# Altium PCB System Control.PcbDoc (part 5 of 7)
Units mil, origin at the board's own origin, x right, y up, seen from the top; angles counter-clockwise.
Board outline 5312.56 x 5103.22 mil, 12 copper layers (Top, GND 2, Signal 3, Signal 4, 3.3V 5, Signal 6, Signal 7, 2.5V 8, Signal 9, Signal 10, GND 11, Bottom); 503 components, 484 nets, 2219 pads, 1158 vias.
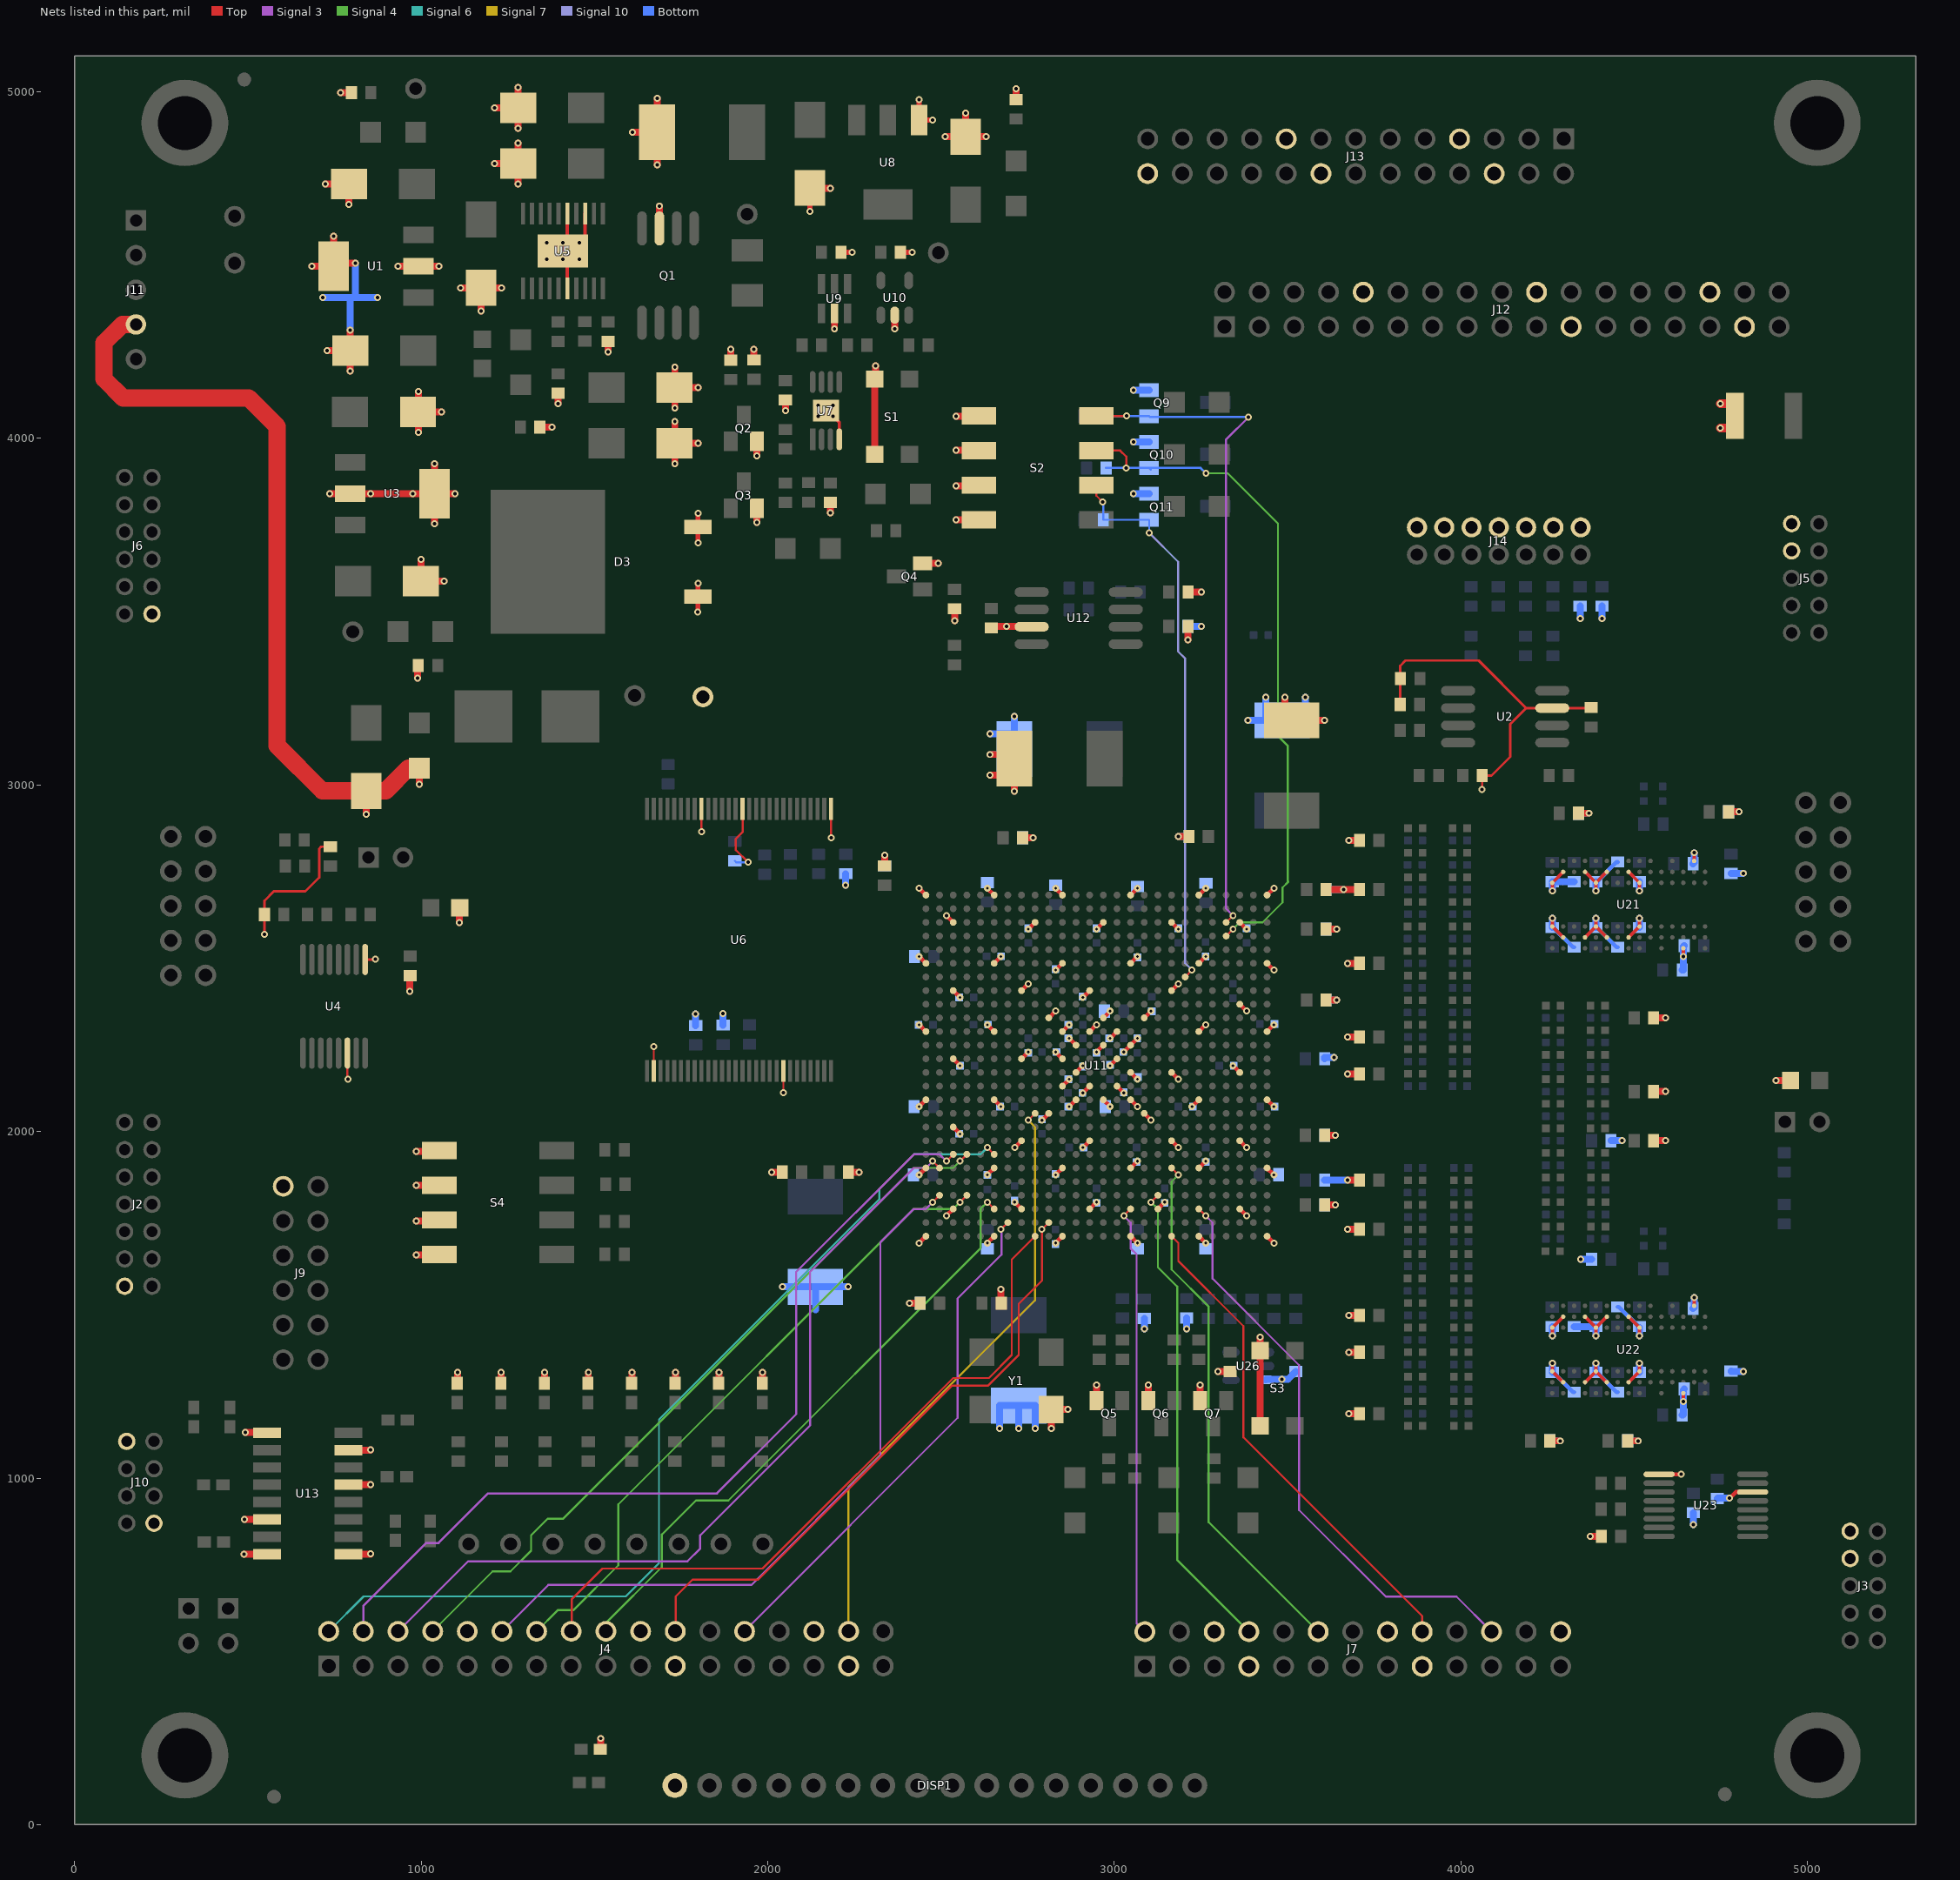
[diagram p15: the nets of this part, all layers, seen from the top]

## Via types
v1: diameter 20, hole 10, Top to Bottom, tented top, 1040 vias
v2: diameter 20, hole 8, Top to Bottom, tented top, 118 vias

## Nets (pads, with @x,y where several pads share a name; then routed paths per layer and width w, separated by ;. In a path a pad name is that pad's centre, name@x,y a point inside that pad or via, vN(x,y) a via of type N, cw(c..) or ccw(c..) an arc to the next point about the centre after c; other vN are vias at no path point) (continued)
FPGA_M0: Q9.1 R152.1 S2.8 U11.AD4 | length 2011.4
  Top w5.91: S2.8@2948.08,4064.88 2948.27,4064.69 v1(3035.28,4064.69) ; U11.AD4@3322.39,2603.54 v1(3342.08,2623.23)
  Signal 3 w5.91: v1(3342.08,2623.23) 3322.39,2642.91 3322.39,3996.85 v1(3387,4061.46)
  Bottom w5.91: R152.1@2968.06,4064.17 2968.58,4064.69 v1(3035.28,4064.69) Q9.1@3091.79,4064.69 ; v1(3387,4061.46) 3102.57,4061.46 Q9.1@3099.85,4064.17 3099.34,4064.69 Q9.1@3091.79,4064.69 ; Q9.1@3091.79,4064.17 Q9.1@3091.79,4064.69 ; Q9.1@3091.79,4064.17 Q9.1@3091.79,4064.69 ; Q9.1@3091.79,4064.17 Q9.1@3091.79,4064.69 ; Q9.1@3091.79,4064.17 Q9.1@3091.79,4064.69 ; Q9.1@3091.79,4064.17 Q9.1@3091.79,4064.69
FPGA_M1: Q10.1 R153.1 S2.7 U11.AC4 | length 2011.7
  Top w5.91: S2.7@2948.08,3964.88 3016.7,3964.88 3034.37,3947.21 v1(3034.37,3914.57) ; U11.AC4@3322.39,2564.17 v1(3342.08,2583.86)
  Signal 4 w5.91: v1(3264.23,3899.12) 3327,3899.12 3472,3754.12 3472,3141 3500.58,3112.42 3500.58,2722.42 3502,2721 3485,2704 3485,2661.02 3427.52,2603.54 3361.76,2603.54 v1(3342.08,2583.86)
  Bottom w5.91: R153.1@2975.93,3914.57 v1(3034.37,3914.57) Q10.1@3099.85,3914.57 ; Q10.1@3105.23,3909.19 Q10.1@3099.85,3914.57 ; v1(3264.23,3899.12) 3248.78,3914.57 Q10.1@3099.85,3914.57
FPGA_M2: Q11.1 R155.1 S2.6 U11.Y7 | length 1618.5
  Top w5.91: S2.6@2948.08,3864.88 2948.08,3834.44 v1(2966.08,3816.45) ; U11.Y7@3204.28,2446.06 v1(3223.97,2465.75)
  Signal 10 w5.91: v1(3100.45,3727.32) 3184,3643.78 3184,3385 3204.28,3364.72 3204.28,2485.43 v1(3223.97,2465.75)
  Bottom w5.91: v1(2966.08,3816.45) 2968.06,3814.47 R155.1@2968.06,3764.96 Q11.1@3099.85,3764.96 3100.45,3764.36 v1(3100.45,3727.32)
GND: C1.N C2.N C3.N C4.N C5.2 C6.2 C7.2 C8.N C9.N C11.N C12.N C13.1 C15.2 C17.2 C18.2 C19.2 C20.2 C22.N C23.N C25.N C31.2 C32.2 C34.2 C35.N C36.2 C37.N C38.N C42.2 C43.2 C44.2 C45.2 C46.2 C47.2 C48.2 C49.2 C50.2 C51.2 C52.2 C53.2 C54.N C55.2 C56.2 C57.2 C58.2 C59.2 C60.2 C61.2 C62.2 C63.2 C64.2 C65.2 C66.2 C67.2 C68.2 C69.2 C76.2 C77.2 C78.2 C80.1 C85.2 C86.2 C87.2 C88.2 C100.2 C102.N C104.2 C105.N C106.2 C107.2 C108.2 C109.2 C110.2 C112.2 C113.2 C115.2 C116.2 C117.2 C118.2 C119.2 C120.2 C121.2 C122.2 C123.2 C124.N C125.2 C126.2 C127.2 C129.2 C130.2 C131.2 C132.2 C133.2 C134.2 C135.2 C136.2 C137.2 C138.2 C139.2 C140.2 C141.2 C142.2 C143.2 C145.2 C146.2 C147.2 C148.2 C149.2 C150.2 C151.2 C152.2 C153.2 C154.2 C155.2 C156.2 C157.2 C158.2 C159.2 C160.2 C161.2 C163.2 C164.2 C165.2 C167.2 C168.2 C169.2 C170.2 C171.2 C172.N C173.2 C174.2 C175.2 C178.2 C179.2 C180.2 C181.2 C182.2 C183.2 C185.2 C186.2 C187.2 C205.2 C208.2 C209.2 C210.2 C211.2 C212.2 C213.2 C214.2 C215.2 C216.2 C225.2 C226.2 C227.2 C228.2 C229.2 C230.2 C231.2 C232.2 C233.2 C234.2 C235.2 C236.2 C237.2 C238.2 C240.2 C241.2 C242.2 C243.2 C244.2 C245.2 C246.2 C247.2 C248.2 C251.2 C253.2 D3.1 D3.3 DISP1.1 J2.14 J3.7 J3.9 J4.10 J4.20 J4.21 J4.30 J4.31 J5.7 J5.9 J6.11 J7.6 J7.7 J7.16 J7.17 J7.26 J9.12 J11.4 J12.10 J12.20 J12.21 J12.30 J12.31 J13.6 J13.7 J13.16 J13.17 J13.26 J14.1 J14.3 J14.5 J14.7 J14.9 J14.11 J14.13 L2.1 Q1.3 Q2.2 Q3.2 Q4.2 Q5.2 Q6.2 Q7.2 Q9.2 Q10.2 Q11.2 R2.1 R3.1 R4.1 R7.1 R10.2 R15.1 R17.1 R18.1 R25.2 R26.1 R28.1 R31.2 R33.1 R34.1 R36.1 R43.1 R44.1 R45.1 R46.1 R129.2 R147.1 R163.1 R165.2 R170.1 R275.1 S1.1 S1.1_1 S2.1 S2.2 S2.3 S2.4 S3.1 S3.1_1 S4.1 S4.2 S4.3 S4.4 TP5.1 U1.2 U1.4 U2.7 U3.2 U3.4 U4.1 U4.14 U5.0 U5.3 U5.5 U5.16 U6.2 U6.21 U6.29 U6.42 U6.48 U7.0 U7.4 U8.1 U9.2 U10.2 U11.A1 U11.A6 U11.A11 U11.A16 U11.A21 U11.A26 U11.AA1 U11.AA6 U11.AA11 U11.AA16 U11.AA21 U11.AA26 U11.AD3 U11.AD8 U11.AD13 U11.AD18 U11.AD24 U11.AF1 U11.AF6 U11.AF11 U11.AF16 U11.AF21 U11.AF26 U11.C3 U11.C9 U11.C14 U11.C19 U11.C24 U11.F1 U11.F6 U11.F11 U11.F16 U11.F21 U11.F26 U11.H3 U11.H8 U11.H14 U11.H19 U11.J24 U11.K10 U11.K17 U11.L1 U11.L6 U11.L11 U11.L13 U11.L15 U11.L21 U11.L26 U11.M12 U11.M14 U11.M16 U11.N3 U11.N8 U11.N11 U11.N15 U11.P12 U11.P16 U11.P19 U11.P24 U11.R11 U11.R13 U11.R15 U11.T1 U11.T6 U11.T12 U11.T14 U11.T16 U11.T21 U11.T26 U11.U10 U11.U13 U11.U17 U11.V3 U11.W8 U11.W14 U11.W19 U11.W24 U12.7 U13.9 U13.13 U13.15 U21.A3 U21.A7 U21.B2 U21.B8 U21.D2 U21.D8 U21.E3 U21.E7 U21.F2 U21.F8 U21.H2 U21.H8 U21.J3 U21.J7 U21.N1 U21.P9 U22.A3 U22.A7 U22.B2 U22.B8 U22.D2 U22.D8 U22.E3 U22.E7 U22.F2 U22.F8 U22.H2 U22.H8 U22.J3 U22.J7 U22.N1 U22.P9 U23.1 U23.14 U26.3 Y1.2 | length 33778.8
  Top w5.91: U6.2@1670.94,2175.05 1670.94,2244.94 v1(1671,2245) ; U6.48@1808.73,2930.95 1808.73,2865.27 v1(1809,2865) ; U6.42@1926.84,2930.95 1927.25,2930.54 1927.25,2864.25 1908,2845 1908,2812 v1(1943,2777) ; U6.21@2044.95,2175.05 2044.95,2112.05 v1(2045,2112) ; U6.29@2182.75,2930.95 2182.75,2848.25 v1(2183,2848)
  Top w7: v1(547.82,2568.47) 547.74,2568.54 C13.1@547.74,2625.97 547.74,2666.05 574.69,2693 666,2693 705.97,2732.97 705.97,2816.4 711.54,2821.97 C5.2@737.74,2821.97 ; U4.14@786.94,2226.44 786.94,2152.75 v1(788.65,2151.05) ; U4.1@838.14,2496.44 866.32,2496.44 v1(867.39,2497.51) ; C20.2@3824.4,3232.23 R15.1@3824.4,3306.23 ; R15.1@3825.4,3307.23 R15.1@3824.4,3306.23 ; v1(4059.96,2987.03) 4061.4,2988.47 C19.2@4061.4,3027.23 4087.84,3027.23 4141.93,3081.32 4141.93,3175.81 4188.06,3221.94 ; C18.2@4375.4,3223.23 4374.11,3221.94 U2.7@4263.37,3221.94 4188.06,3221.94 ; R15.1@3824.4,3306.23 R15.1@3824.4,3307.23 ; R15.1@3824.4,3306.23 R15.1@3824.4,3307.23 ; R15.1@3824.4,3306.23 3824.4,3343.72 ; R15.1@3824.4,3306.23 R15.1@3824.4,3307.23 ; R15.1@3824.4,3306.23 R15.1@3824.4,3307.23 ; R15.1@3824.4,3307.23 3824.4,3343.72 ; R15.1@3824.4,3307.23 3824.4,3343.72 ; R15.1@3824.4,3307.23 3824.4,3343.72 ; R15.1@3824.4,3307.23 3824.4,3343.72 ; 3824.4,3343.72 3839.63,3358.95 4051.05,3358.95 4188.06,3221.94
  Top w10: v1(1456.25,4564.17) 1472.98,4580.91 U5.3@1472.98,4648.82 ; U7.0@2167.86,4079.92 U7.0@2167.86,4095.67 ; U7.4@2206.25,3997.24 2206.25,4046.46 v1(2188.53,4064.17) ; v1(4263.34,1331.89) U22.A3@4263.34,1308.27 U22.B2@4294.83,1276.77 ; v1(4263.34,1410.63) U22.A7@4263.34,1434.25 U22.B8@4294.83,1465.75 ; v1(4263.34,2615.35) U21.A3@4263.34,2591.73 U21.B2@4294.83,2560.24 ; v1(4263.34,2694.09) U21.A7@4263.34,2717.72 U21.B8@4294.83,2749.21 ; U22.D2@4357.82,1276.77 U22.E3@4389.32,1308.27 ; U22.D8@4357.82,1465.75 U22.E7@4389.32,1434.25 ; U21.D2@4357.82,2560.24 U21.E3@4389.32,2591.73 ; U21.D8@4357.82,2749.21 U21.E7@4389.32,2717.72 ; v1(4389.32,1331.89) U22.E3@4389.32,1308.27 ; v1(4389.32,1410.63) U22.E7@4389.32,1434.25 ; v1(4389.32,2615.35) U21.E3@4389.32,2591.73 ; v1(4389.32,2694.09) U21.E7@4389.32,2717.72 ; U22.F2@4420.82,1276.77 U22.E3@4389.32,1308.27 ; U22.F8@4420.82,1465.75 U22.E7@4389.32,1434.25 ; U21.F2@4420.82,2560.24 U21.E3@4389.32,2591.73 ; U21.F8@4420.82,2749.21 U21.E7@4389.32,2717.72 ; U22.H2@4483.81,1276.77 U22.J3@4515.3,1308.27 v1(4515.3,1331.89) ; U22.H8@4483.81,1465.75 U22.J7@4515.3,1434.25 v1(4515.3,1410.63) ; U21.H2@4483.81,2560.24 U21.J3@4515.3,2591.73 v1(4515.3,2615.35) ; U21.H8@4483.81,2749.21 U21.J7@4515.3,2717.72 v1(4515.3,2694.09) ; v1(4641.29,1221.65) U22.N1@4641.29,1245.28 ; v1(4641.29,2505.12) U21.N1@4641.29,2528.74 ; U22.P9@4672.78,1497.24 v1(4672.78,1520.87) ; U21.P9@4672.78,2780.71 v1(4672.78,2804.33) ; U5.16@1421.8,4432.28 U5.0@1421.8,4516.93 ; U5.16@1421.8,4432.28 U5.0@1421.8,4516.93 ; U5.16@1421.8,4432.28 U5.0@1421.8,4516.93 ; U5.16@1421.8,4432.28 U5.0@1421.8,4516.93 ; U5.16@1421.8,4432.28 U5.0@1421.8,4516.93 ; U5.0@1421.8,4516.93 U5.0@1421.8,4540.55 ; U5.0@1421.8,4516.93 U5.0@1421.8,4540.55 ; U5.0@1421.8,4516.93 U5.0@1421.8,4540.55 ; U5.0@1421.8,4516.93 U5.0@1421.8,4540.55 ; U5.0@1421.8,4516.93 U5.0@1421.8,4540.55 ; U5.0@1421.8,4540.55 U5.0@1421.8,4564.17 ; U5.0@1421.8,4540.55 U5.0@1421.8,4564.17 ; U5.0@1421.8,4540.55 U5.0@1421.8,4564.17 ; U5.0@1421.8,4540.55 U5.0@1421.8,4564.17 ; U5.0@1421.8,4540.55 U5.0@1421.8,4564.17 ; U5.0@1421.8,4564.17 U5.5@1421.8,4648.82 ; U5.0@1421.8,4564.17 U5.5@1421.8,4648.82 ; U5.0@1421.8,4564.17 U5.5@1421.8,4648.82 ; U5.0@1421.8,4564.17 U5.5@1421.8,4648.82 ; U5.0@1421.8,4564.17 U5.5@1421.8,4648.82 ; v1(2145.22,4064.17) U7.0@2167.86,4064.17 ; v1(2145.22,4064.17) U7.0@2167.86,4064.17 ; v1(2145.22,4064.17) U7.0@2145.22,4079.92 ; v1(2145.22,4064.17) U7.0@2145.22,4079.92 ; v1(2145.22,4064.17) U7.0@2145.22,4079.92 ; v1(2145.22,4064.17) U7.0@2167.86,4064.17 ; v1(2145.22,4064.17) U7.0@2167.86,4064.17 ; v1(2145.22,4064.17) U7.0@2145.22,4079.92 ; U7.0@2145.22,4079.92 v1(2145.22,4095.67) ; U7.0@2145.22,4079.92 v1(2145.22,4095.67) ; U7.0@2145.22,4079.92 v1(2145.22,4095.67) ; U7.0@2145.22,4079.92 v1(2145.22,4095.67) ; v1(2145.22,4095.67) U7.0@2167.86,4095.67 ; v1(2145.22,4095.67) U7.0@2167.86,4095.67 ; v1(2145.22,4095.67) U7.0@2167.86,4095.67 ; v1(2145.22,4095.67) U7.0@2167.86,4095.67 ; U7.0@2167.86,4064.17 v1(2188.53,4064.17) ; U7.0@2167.86,4064.17 v1(2188.53,4064.17) ; U7.0@2167.86,4064.17 v1(2188.53,4064.17) ; U7.0@2167.86,4064.17 v1(2188.53,4064.17) ; U7.0@2167.86,4095.67 v1(2188.53,4095.67) ; U7.0@2167.86,4095.67 v1(2188.53,4095.67) ; U7.0@2167.86,4095.67 v1(2188.53,4095.67) ; U7.0@2167.86,4095.67 v1(2188.53,4095.67) ; v1(2188.53,4064.17) U7.0@2188.53,4079.92 ; v1(2188.53,4064.17) U7.0@2188.53,4079.92 ; v1(2188.53,4064.17) U7.0@2188.53,4079.92 ; v1(2188.53,4064.17) U7.0@2188.53,4079.92 ; U7.0@2188.53,4079.92 v1(2188.53,4095.67) ; U7.0@2188.53,4079.92 v1(2188.53,4095.67) ; U7.0@2188.53,4079.92 v1(2188.53,4095.67) ; U7.0@2188.53,4079.92 v1(2188.53,4095.67)
  Top w12: v1(2436.56,1678.34) U11.A26@2456.25,1698.03 ; v2(2436.56,1875.19) U11.F26@2456.25,1894.88 ; v2(2436.56,2072.04) U11.L26@2456.25,2091.73 ; v2(2436.56,2308.27) U11.T26@2456.25,2288.58 ; v2(2436.56,2505.12) U11.AA26@2456.25,2485.43 ; v1(2436.56,2701.97) U11.AF26@2456.25,2682.28 ; v1(2515.3,1757.08) U11.C24@2534.99,1776.77 ; v1(2515.3,2623.23) U11.AD24@2534.99,2603.54 ; U11.P24@2534.99,2209.84 v2(2554.67,2190.16) ; U11.W24@2534.99,2406.69 v2(2554.67,2387.01) ; v2(2633.41,1678.34) U11.A21@2653.1,1698.03 ; v2(2633.41,1875.19) U11.F21@2653.1,1894.88 ; v2(2633.41,2308.27) U11.T21@2653.1,2288.58 ; v2(2633.41,2701.97) U11.AF21@2653.1,2682.28 ; U11.L21@2653.1,2091.73 v2(2672.79,2072.04) ; U11.AA21@2653.1,2485.43 v2(2672.79,2505.12) ; v2(2712.15,1796.46) U11.C19@2731.84,1776.77 ; v1(2712.15,1953.93) U11.H19@2731.84,1973.62 ; U11.P19@2731.84,2209.84 v2(2751.53,2229.53) ; U11.W19@2731.84,2406.69 v1(2751.53,2426.38) ; v2(2751.52,2583.86) U11.AD18@2771.21,2603.54 ; v2(2790.89,2032.67) U11.K17@2810.58,2052.36 ; U11.U17@2810.58,2327.95 v1(2830.27,2347.64) ; v2(2830.26,1678.34) U11.A16@2849.95,1698.03 ; v2(2830.26,1875.19) U11.F16@2849.95,1894.88 ; v2(2830.26,2229.53) U11.P16@2849.95,2209.84 ; v2(2830.26,2465.75) U11.AA16@2849.95,2485.43 ; v2(2830.26,2701.97) U11.AF16@2849.95,2682.28 ; U11.M16@2849.95,2131.1 v2(2869.64,2150.79) ; U11.T16@2849.95,2288.58 v2(2869.64,2308.27) ; v2(2869.63,2072.04) U11.L15@2889.32,2091.73 ; v2(2869.63,2268.9) U11.R15@2889.32,2249.21 ; U11.N15@2889.32,2170.47 v2(2909.01,2190.16) ; v2(2909,1953.93) U11.H14@2928.69,1973.62 ; v2(2909.01,2111.42) U11.M14@2928.69,2131.1 ; v2(2909,2387.01) U11.W14@2928.69,2406.69 ; U11.C14@2928.69,1776.77 v2(2948.38,1796.46) ; U11.T14@2928.69,2288.58 v1(2948.38,2308.27) ; v2(2948.37,2229.53) U11.R13@2968.06,2249.21 ; v2(2948.37,2583.86) U11.AD13@2968.06,2603.54 ; U11.L13@2968.06,2091.73 v2(2987.75,2072.04) ; U11.U13@2968.06,2327.95 v2(2987.75,2347.64) ; v2(2987.74,2190.16) U11.P12@3007.43,2209.84 ; v2(2987.74,2268.9) U11.T12@3007.43,2288.58 ; U11.M12@3007.43,2131.1 v2(3027.12,2111.42) ; v2(3027.11,2229.53) U11.R11@3046.8,2249.21 v2(3066.49,2268.9) ; U11.A11@3046.8,1698.03 v2(3066.49,1678.34) ; U11.F11@3046.8,1894.88 v2(3066.49,1914.57) ; U11.L11@3046.8,2091.73 v1(3066.49,2072.04) ; U11.N11@3046.8,2170.47 v2(3066.49,2150.79) ; U11.AA11@3046.8,2485.43 v2(3066.49,2505.12) ; U11.AF11@3046.8,2682.28 v2(3066.49,2701.97) ; U11.K10@3086.17,2052.36 v1(3105.86,2032.67) ; U11.U10@3086.17,2327.95 v2(3105.86,2347.64) ; U11.C9@3125.54,1776.77 v2(3145.23,1796.46) ; U11.H8@3164.91,1973.62 v1(3184.6,1953.93) ; U11.N8@3164.91,2170.47 v1(3184.6,2150.79) ; U11.W8@3164.91,2406.69 v1(3184.6,2426.38) ; U11.AD8@3164.91,2603.54 v2(3184.6,2583.86) ; v2(3223.96,2072.04) U11.L6@3243.65,2091.73 ; U11.A6@3243.65,1698.03 v2(3263.34,1678.34) ; U11.F6@3243.65,1894.88 v2(3263.34,1914.57) ; U11.T6@3243.65,2288.58 v1(3263.34,2308.27) ; U11.AA6@3243.65,2485.43 v2(3263.34,2505.12) ; U11.AF6@3243.65,2682.28 v2(3263.34,2701.97) ; v2(3342.07,2190.16) U11.N3@3361.76,2170.47 ; U11.C3@3361.76,1776.77 v1(3381.45,1757.08) ; U11.H3@3361.76,1973.62 v1(3381.45,1953.93) ; U11.V3@3361.76,2367.32 v1(3381.45,2347.64) ; U11.AD3@3361.76,2603.54 v2(3381.45,2583.86) ; U11.A1@3440.5,1698.03 v1(3460.19,1678.34) ; U11.F1@3440.5,1894.88 v2(3460.19,1875.19) ; U11.L1@3440.5,2091.73 v2(3460.19,2072.04) ; U11.T1@3440.5,2288.58 v2(3460.19,2308.27) ; U11.AA1@3440.5,2485.43 v1(3460.19,2465.75) ; U11.AF1@3440.5,2682.28 v1(3460.19,2701.97) ; U11.J24@2534.99,2012.99 v2(2554.68,1993.31) U11.J24@2534.99,2012.99
  Top w12.01: U23.1@4571.56,1011.14 v1(4635.26,1011.14) ; v1(4775.15,942.13) 4792.98,959.96 ; 4792.98,959.96 U23.14@4841.56,959.96 ; 4792.98,959.96 U23.14@4841.56,959.96 ; 4792.98,959.96 U23.14@4841.56,959.96 ; 4792.98,959.96 U23.14@4841.56,959.96 ; 4792.98,959.96 U23.14@4841.56,959.96
  Top w13.78: v1(1798.18,3499.43) D3.1@1798.18,3543.82 1798.18,3581.66 v1(1798.88,3582.36) ; v1(1798.47,3698.3) 1798.47,3743.52 D3.3@1798.18,3743.82 1798.18,3783.53 v1(1798.47,3783.82)
  Top w15: v1(2121.6,4654.72) C37.N@2121.6,4721.65 ; C42.2@2211.07,4536.61 v1(2243.65,4536.61) ; C44.2@2382.33,4536.61 v1(2416.88,4536.61) ; v1(2436.56,4977.56) U8.1@2436.56,4918.5 v1(2475.93,4918.5)
  Top w20: v1(684.59,4497.24) 747.11,4497.24 U1.4@747.59,4496.77 ; v1(723.97,4733.46) C1.N@791.74,4733.46 ; v1(727.9,4253.15) C3.N@794.83,4253.15 ; v1(747.59,4583.86) U1.4@747.59,4496.77 ; v1(767.27,4997.24) R2.1@798.77,4997.24 ; U13.9@790,781 854,781 v1(854.31,781.3) ; U13.13@790,981 854,981 v1(854.31,981.3) ; U13.15@790,1081 854,1081 v1(854.31,1081.3) ; v1(790.89,4674.41) C1.N@790.89,4732.6 ; U3.2@794.83,3840.32 U3.2@794.83,3839.76 ; C3.N@795.68,4253.15 C3.N@794.83,4253.15 ; v1(810.58,4505.12) 756.09,4505.12 U1.4@747.68,4496.69 U1.4@747.59,4496.77 ; v1(841.49,2915.12) C8.N@841.49,2982.9 ; v1(932.63,4497.24) 991.13,4497.24 U1.2@991.68,4496.69 992.23,4497.24 v1(1050.74,4497.24) ; v1(967,2405) C6.2@967,2449 ; v1(985.86,1643.96) v1@985.94,1643.88 ; v1(985.86,1742.39) 1050.59,1742.39 S4.3@1052.08,1743.88 ; v1(985.86,1844.75) S4.2@1051.22,1844.75 ; v1(985.86,1943.17) 1051.37,1943.17 S4.1@1052.08,1943.88 ; v1(989.24,3307.64) R3.1@989.24,3343.07 ; C2.N@990.83,4075.98 C2.N@991.68,4075.98 ; v1(995.03,3001.73) C7.2@995.03,3048.9 C7.2@995.03,3048.98 ; C4.N@998.71,3587.8 C4.N@999.56,3587.8 ; U3.4@1038.83,3840.32 U3.4@1038.93,3840.31 ; v1(1038.93,3753.15) U3.4@1038.93,3839.76 ; v1(1058.61,4075.98) C2.N@991.68,4075.98 ; v1(1066.48,3587.8) C4.N@999.56,3587.8 ; v1(1097.98,3839.76) U3.4@1038.93,3839.76 ; R46.1@1104,1273.92 R46.1@1104,1274 1105,1275 v1(1105,1305) ; v1(1110,2603) R10.2@1110,2633 ; R10.2@1111.74,2645.97 1111.82,2645.97 R10.2@1112.82,2644.97 ; v1(1113.73,4434.25) C9.N@1171.92,4434.25 ; v1(1172.78,4367.32) C9.N@1172.78,4434.25 ; C9.N@1172.78,4435.1 C9.N@1172.78,4434.25 ; v1(1212.15,4792.52) C12.N@1279.93,4792.52 ; v1(1212.15,4953.94) C11.N@1279.08,4953.94 ; R45.1@1229.71,1274 1229.71,1274.08 1230.71,1275.08 v1(1230.71,1305.08) ; v1(1279.08,4733.46) C12.N@1279.08,4791.65 ; v1(1279.08,4851.57) C12.N@1279.08,4793.39 ; v1(1279.08,4894.88) C11.N@1279.08,4953.07 ; R4.1@1342.07,4032.68 v1(1377.51,4032.68) ; R44.1@1355.43,1274 1355.43,1274.08 1356.43,1275.08 v1(1356.43,1305.08) ; v1(1395.22,4099.61) C15.2@1395.22,4130.22 ; v1(1456.25,4516.93) U5.0@1421.8,4516.93 ; v1(1456.25,4564.17) U5.0@1421.8,4564.17 ; R43.1@1481.14,1274 1481.14,1274.08 1482.14,1275.08 v1(1482.14,1305.08) ; R7.1@1517,218 1517,218.08 1518,219.08 v1(1518,249.08) ; v1(1538.93,4249.21) C17.2@1538.93,4279.83 ; R36.1@1606.86,1274 1606.86,1274.08 1607.86,1275.08 v1(1607.86,1305.08) ; v1(1680.66,4788.58) C25.N@1680.66,4883.07 ; Q1.3@1687.15,4605.51 v1(1687.15,4670.47) ; C23.N@1730.99,3985.43 C23.N@1731.84,3985.43 ; v1(1731.84,4087.8) C22.N@1731.84,4145.98 ; v1(1731.84,4205.91) C22.N@1731.84,4147.72 ; R34.1@1732.57,1274 1732.57,1274.08 1733.57,1275.08 v1(1733.57,1305.08) ; v1(1798.77,3985.43) C23.N@1731.84,3985.43 ; v1(1798.77,4146.85) C22.N@1730.99,4146.85 ; R28.1@1858.29,1274 1858.29,1274.08 1859.29,1275.08 v1(1859.29,1305.08) ; R17.1@1893.26,4225.59 v1(1893.26,4257.09) ; C31.2@1960.19,4226.47 v1(1960.19,4257.09) ; R18.1@1984,1274 1984,1274.08 1985,1275.08 v1(1985,1305.08) ; v1(2011.37,1883.07) C36.2@2041.98,1883.07 ; v1(2050.74,4079.92) C34.2@2050.74,4110.53 ; C37.N@2121.6,4722.5 C37.N@2121.6,4721.65 ; v1(2180.66,3784.65) R25.2@2180.66,3815.26 ; v1(2192.47,4316.14) U9.2@2192.47,4360.43 ; C43.2@2232.72,1883.07 v1(2263.34,1883.07) ; S1.1@2308.61,3953.94 S1.1_1@2308.61,4170.94 2310.58,4172.91 v1(2310.58,4209.84) ; C45.2@2336.93,2766.69 v1(2336.93,2797.3) ; v1(2365.7,4316.14) 2365.7,4354.88 U10.2@2366.33,4355.51 ; v1(2409,1505.12) C46.2@2439.62,1505.12 ; v1(2491.68,3638.98) v1@2491.68,3639.17 ; v1(2511.37,4871.26) 2569.56,4871.26 C38.N@2570.42,4870.41 C38.N@2570.42,4871.26 ; v1(2538.93,3473.62) R31.2@2538.93,3508.17 ; v1(2542.86,3764.96) 2542.94,3764.88 S2.4@2609.08,3764.88 ; v1(2542.86,3863.39) 2607.59,3863.39 S2.3@2609.08,3864.88 ; v1(2542.86,3965.75) 2608.22,3965.75 S2.2@2609.08,3964.88 ; v1(2542.86,4064.17) 2608.37,4064.17 S2.1@2609.08,4064.88 ; v1(2570.42,4938.19) C38.N@2570.42,4871.26 ; C48.2@2645.22,3453.06 2650.03,3457.87 v1(2688.53,3457.87) 2759.99,3457.87 U12.7@2761.37,3456.5 ; v1(2672.78,1544.49) 2672.78,1505.98 C47.2@2673.65,1505.12 ; v1@2711.41,2981.77 v1(2711.56,2981.61) C35.N@2711.56,3028.85 ; R33.1@2716.09,4977.56 v1(2716.09,5009.06) ; C49.2@2734.98,2847.64 v1(2765.59,2847.64) ; Y1.2@2817.67,1198.03 Y1.2@2818.45,1198.03 ; v1(2865.7,1198.03) Y1.2@2818.45,1198.03 ; v1(2948.37,1268.9) Q5.2@2948.37,1223.9 ; v1(3097.98,1268.9) Q6.2@3097.98,1223.9 ; v1(3184.59,2851.57) C50.2@3215.21,2851.57 ; v1(3212.15,3418.5) 3212.15,3457.01 C52.2@3213.04,3457.87 ; C51.2@3212.15,3557.17 C51.2@3213.04,3556.3 ; C51.2@3213.04,3556.3 v1(3251.52,3556.3) ; v1(3247.59,1268.9) Q7.2@3247.59,1223.9 ; C53.2@3334.2,1307.39 C53.2@3334.2,1308.27 ; S3.1@3420.82,1150.79 S3.1_1@3420.82,1367.79 v1(3420.82,1406.69) ; v1(3605.85,3186.22) C54.N@3550.74,3186.22 ; C56.2@3606.74,1788.58 v1(3637.35,1788.58) ; C55.2@3606.74,1989.37 v1(3637.35,1989.37) ; C63.2@3610.67,2379.13 v1(3641.29,2379.13) ; C59.2@3610.67,2583.86 v1(3641.29,2583.86) ; C60.2@3610.67,2698.03 v1(3660.97,2698.03) C58.2@3707.34,2698.03 ; v1(3672.78,1717.72) C66.2@3707.34,1717.72 ; v1(3672.78,1859.45) C65.2@3707.34,1859.45 ; v1(3672.78,2166.54) C64.2@3707.34,2166.53 ; v1(3672.78,2272.83) C62.2@3707.34,2272.83 ; v1(3672.78,2485.43) C61.2@3707.34,2485.43 ; v1(3676.72,1186.22) C69.2@3707.34,1186.22 ; v1(3676.72,1363.39) C68.2@3707.34,1363.39 ; v1(3676.72,1469.68) C67.2@3707.34,1469.68 ; v1(3676.72,2839.76) C57.2@3707.34,2839.76 ; C76.2@4256.34,1107.48 v1(4286.96,1107.48) ; C77.2@4339.02,2918.5 v1(4369.63,2918.5) ; v1(4373.57,831.89) C80.1@4405.07,831.89 ; C78.2@4480.75,1107.48 v1(4511.37,1107.48) ; C87.2@4555.56,1973.62 v1(4590.11,1973.62) ; C86.2@4555.56,2115.35 v1(4590.11,2115.35) ; C85.2@4555.56,2327.95 v1(4590.11,2327.95) ; C88.2@4772.09,2922.44 v1(4802.71,2922.44) ; v1(4909,2146.85) R129.2@4950.99,2146.85 ; v1(735.78,3839.76) U3.2@794.83,3839.76 ; v1(735.78,3839.76) U3.2@794.83,3839.76 ; v1(735.78,3839.76) U3.2@794.83,3839.76 ; v1(735.78,3839.76) U3.2@794.83,3839.76 ; v1(735.78,3839.76) U3.2@794.83,3839.76 ; C1.N@790.89,4732.6 C1.N@791.74,4733.46 ; C1.N@790.89,4732.6 C1.N@791.74,4733.46 ; C1.N@790.89,4732.6 C1.N@791.74,4733.46 ; C1.N@790.89,4732.6 C1.N@791.74,4733.46 ; C1.N@790.89,4732.6 C1.N@791.74,4733.46 ; U3.2@794.83,3839.76 v1(853.89,3839.76) ; U3.2@794.83,3839.76 v1(853.89,3839.76) ; U3.2@794.83,3839.76 v1(853.89,3839.76) ; U3.2@794.83,3839.76 v1(853.89,3839.76) ; U3.2@794.83,3839.76 v1(853.89,3839.76) ; v1(794.83,4194.09) C3.N@794.83,4253.15 ; v1(794.83,4194.09) C3.N@794.83,4253.15 ; v1(794.83,4194.09) C3.N@794.83,4253.15 ; v1(794.83,4194.09) C3.N@794.83,4253.15 ; v1(794.83,4194.09) C3.N@794.83,4253.15 ; C3.N@794.83,4253.15 v1(794.83,4312.2) ; C3.N@794.83,4253.15 v1(794.83,4312.2) ; C3.N@794.83,4253.15 v1(794.83,4312.2) ; C3.N@794.83,4253.15 v1(794.83,4312.2) ; C3.N@794.83,4253.15 v1(794.83,4312.2) ; v1(853.89,3839.76) v1(975.93,3839.76) ; v1(975.93,3839.76) U3.4@1038.83,3839.76 ; v1(975.93,3839.76) U3.4@1038.83,3839.76 ; v1(975.93,3839.76) U3.4@1038.83,3839.76 ; v1(975.93,3839.76) U3.4@1038.83,3839.76 ; v1(975.93,3839.76) U3.4@1038.83,3839.76 ; v1@985.94,1643.88 1052.08,1643.88 1052,1643.88 v1@985.94,1643.88 ; v1(991.68,4016.93) C2.N@991.68,4075.98 ; v1(991.68,4016.93) C2.N@991.68,4075.98 ; v1(991.68,4016.93) C2.N@991.68,4075.98 ; v1(991.68,4016.93) C2.N@991.68,4075.98 ; v1(991.68,4016.93) C2.N@991.68,4075.98 ; C2.N@991.68,4075.98 v1(991.68,4135.04) ; C2.N@991.68,4075.98 v1(991.68,4135.04) ; C2.N@991.68,4075.98 v1(991.68,4135.04) ; C2.N@991.68,4075.98 v1(991.68,4135.04) ; C2.N@991.68,4075.98 v1(991.68,4135.04) ; C4.N@999.56,3587.8 v1(999.56,3650.79) ; C4.N@999.56,3587.8 v1(999.56,3650.79) ; C4.N@999.56,3587.8 v1(999.56,3650.79) ; C4.N@999.56,3587.8 v1(999.56,3650.79) ; C4.N@999.56,3587.8 v1(999.56,3650.79) ; U3.4@1038.83,3839.76 U3.4@1038.93,3839.76 ; U3.4@1038.83,3839.76 U3.4@1038.93,3839.76 ; U3.4@1038.83,3839.76 U3.4@1038.93,3839.76 ; U3.4@1038.83,3839.76 U3.4@1038.93,3839.76 ; U3.4@1038.83,3839.76 U3.4@1038.93,3839.76 ; U3.4@1038.93,3839.76 U3.4@1038.93,3840.31 ; U3.4@1038.93,3840.32 v1(1038.93,3926.38) ; U3.4@1038.93,3840.32 v1(1038.93,3926.38) ; U3.4@1038.93,3840.32 v1(1038.93,3926.38) ; U3.4@1038.93,3840.32 v1(1038.93,3926.38) ; U3.4@1038.93,3840.32 v1(1038.93,3926.38) ; S4.2@1051.22,1844.75 1052.08,1843.88 1051.48,1844.48 S4.2@1051.22,1844.75 ; C9.N@1171.92,4434.25 C9.N@1172.78,4435.1 ; C9.N@1171.92,4434.25 C9.N@1172.78,4435.1 ; C9.N@1171.92,4434.25 C9.N@1172.78,4435.1 ; C9.N@1171.92,4434.25 C9.N@1172.78,4435.1 ; C9.N@1171.92,4434.25 C9.N@1172.78,4435.1 ; C9.N@1172.78,4434.25 v1(1231.84,4434.25) ; C9.N@1172.78,4434.25 v1(1231.84,4434.25) ; C9.N@1172.78,4434.25 v1(1231.84,4434.25) ; C9.N@1172.78,4434.25 v1(1231.84,4434.25) ; C9.N@1172.78,4434.25 v1(1231.84,4434.25) ; C12.N@1279.08,4791.65 C12.N@1279.93,4792.52 ; C12.N@1279.08,4791.65 C12.N@1279.93,4792.52 ; C12.N@1279.08,4791.65 C12.N@1279.93,4792.52 ; C12.N@1279.08,4791.65 C12.N@1279.93,4792.52 ; C12.N@1279.08,4791.65 C12.N@1279.93,4792.52 ; C12.N@1279.08,4793.39 C12.N@1279.93,4792.52 ; C12.N@1279.08,4793.39 C12.N@1279.93,4792.52 ; C12.N@1279.08,4793.39 C12.N@1279.93,4792.52 ; C12.N@1279.08,4793.39 C12.N@1279.93,4792.52 ; C12.N@1279.08,4793.39 C12.N@1279.93,4792.52 ; C11.N@1279.08,4953.07 C11.N@1279.93,4953.94 ; C11.N@1279.08,4953.07 C11.N@1279.93,4953.94 ; C11.N@1279.08,4953.07 C11.N@1279.93,4953.94 ; C11.N@1279.08,4953.07 C11.N@1279.93,4953.94 ; C11.N@1279.08,4953.07 C11.N@1279.93,4953.94 ; C11.N@1279.08,4953.94 v1(1279.08,5012.99) ; C11.N@1279.08,4953.94 v1(1279.08,5012.99) ; C11.N@1279.08,4953.94 v1(1279.08,5012.99) ; C11.N@1279.08,4953.94 v1(1279.08,5012.99) ; C11.N@1279.08,4953.94 v1(1279.08,5012.99) ; C11.N@1279.08,4953.94 C11.N@1279.93,4953.94 ; v1(1361.76,4516.93) v1(1409,4516.93) ; v1(1361.76,4516.93) v1(1409,4516.93) ; v1(1361.76,4516.93) v1(1409,4516.93) ; v1(1361.76,4516.93) v1(1409,4516.93) ; v1(1361.76,4564.17) v1(1409,4564.17) ; v1(1361.76,4564.17) v1(1409,4564.17) ; v1(1361.76,4564.17) v1(1409,4564.17) ; v1(1361.76,4564.17) v1(1409,4564.17) ; v1(1409,4516.93) U5.0@1409,4540.55 v1(1409,4564.17) ; v1(1409,4516.93) U5.0@1421.8,4516.93 ; v1(1409,4516.93) U5.0@1421.8,4516.93 ; v1(1409,4516.93) U5.0@1421.8,4516.93 ; v1(1409,4516.93) U5.0@1421.8,4516.93 ; v1(1409,4564.17) U5.0@1421.8,4564.17 ; v1(1409,4564.17) U5.0@1421.8,4564.17 ; v1(1409,4564.17) U5.0@1421.8,4564.17 ; v1(1409,4564.17) U5.0@1421.8,4564.17 ; C25.N@1680.5,4883.07 v1(1609.79,4883.07) C25.N@1680.5,4883.07 ; C25.N@1680.5,4883.07 C25.N@1680.66,4883.07 ; C25.N@1680.5,4883.07 C25.N@1680.66,4883.07 ; C25.N@1680.66,4883.07 v1(1680.66,4981.5) ; C25.N@1680.66,4883.07 v1(1680.66,4981.5) ; C25.N@1680.66,4883.07 v1(1680.66,4981.5) ; C25.N@1680.66,4883.07 v1(1680.66,4981.5) ; C25.N@1680.66,4883.07 v1(1680.66,4981.5) ; C22.N@1730.99,4146.85 C22.N@1731.84,4145.98 ; C22.N@1730.99,4146.85 C22.N@1731.84,4145.98 ; C22.N@1730.99,4146.85 C22.N@1731.84,4145.98 ; C22.N@1730.99,4146.85 C22.N@1731.84,4147.72 ; C22.N@1730.99,4146.85 C22.N@1731.84,4147.72 ; C22.N@1730.99,4146.85 C22.N@1731.84,4147.72 ; C22.N@1730.99,4146.85 C22.N@1731.84,4145.98 ; C22.N@1730.99,4146.85 C22.N@1731.84,4147.72 ; C22.N@1730.99,4146.85 C22.N@1731.84,4147.72 ; C22.N@1730.99,4146.85 C22.N@1731.84,4145.98 ; C22.N@1730.99,4146.85 C22.N@1731.84,4147.72 ; C22.N@1730.98,4146.84 C22.N@1731.84,4145.98 ; v1(1731.84,3926.38) C23.N@1731.84,3985.43 ; v1(1731.84,3926.38) C23.N@1731.84,3985.43 ; v1(1731.84,3926.38) C23.N@1731.84,3985.43 ; v1(1731.84,3926.38) C23.N@1731.84,3985.43 ; v1(1731.84,3926.38) C23.N@1731.84,3985.43 ; C23.N@1731.84,3985.43 v1(1731.84,4048.43) ; C23.N@1731.84,3985.43 v1(1731.84,4048.43) ; C23.N@1731.84,3985.43 v1(1731.84,4048.43) ; C23.N@1731.84,3985.43 v1(1731.84,4048.43) ; C23.N@1731.84,3985.43 v1(1731.84,4048.43) ; v1(1968.06,3757.09) Q3.2@1968.06,3798.33 ; v1(1968.06,3757.09) Q3.2@1968.06,3798.33 ; v1(1968.06,3757.09) Q3.2@1968.06,3798.33 ; v1(1968.06,3757.09) Q3.2@1968.06,3798.33 ; v1(1968.06,3757.09) Q3.2@1968.06,3798.33 ; Q3.2@1968.06,3798.35 Q3.2@1968.26,3798.35 ; Q3.2@1968.06,3798.35 Q3.2@1968.26,3798.35 ; Q3.2@1968.06,3798.35 Q3.2@1968.26,3798.35 ; Q3.2@1968.06,3798.35 Q3.2@1968.26,3798.35 ; Q3.2@1968.06,3798.35 Q3.2@1968.26,3798.35 ; v1(1968.06,3950) Q2.2@1968.06,3991.24 ; v1(1968.06,3950) Q2.2@1968.06,3991.24 ; v1(1968.06,3950) Q2.2@1968.06,3991.24 ; v1(1968.06,3950) Q2.2@1968.06,3991.24 ; v1(1968.06,3950) Q2.2@1968.06,3991.24 ; Q2.2@1968.06,3991.26 Q2.2@1968.26,3991.24 ; Q2.2@1968.06,3991.26 Q2.2@1968.26,3991.24 ; Q2.2@1968.06,3991.26 Q2.2@1968.26,3991.24 ; Q2.2@1968.06,3991.26 Q2.2@1968.26,3991.24 ; Q2.2@1968.06,3991.26 Q2.2@1968.26,3991.24 ; C37.N@2121.6,4721.65 v1(2180.66,4721.65) ; C37.N@2121.6,4721.65 v1(2180.66,4721.65) ; C37.N@2121.6,4721.65 v1(2180.66,4721.65) ; C37.N@2121.6,4721.65 v1(2180.66,4721.65) ; C37.N@2121.6,4721.65 v1(2180.66,4721.65) ; Q4.2@2446.5,3639.17 v1@2491.68,3639.17 ; Q4.2@2446.5,3639.17 v1@2491.68,3639.17 ; Q4.2@2446.5,3639.17 v1@2491.68,3639.17 ; Q4.2@2446.5,3639.17 v1@2491.68,3639.17 ; Q4.2@2446.5,3639.17 v1@2491.68,3639.17 ; C38.N@2570.42,4871.26 v1(2629.48,4871.26) ; C38.N@2570.42,4871.26 v1(2629.48,4871.26) ; C38.N@2570.42,4871.26 v1(2629.48,4871.26) ; C38.N@2570.42,4871.26 v1(2629.48,4871.26) ; C38.N@2570.42,4871.26 v1(2629.48,4871.26) ; v1(2640.7,3028.85) C35.N@2711.41,3028.85 ; v1(2640.7,3028.85) C35.N@2711.41,3028.85 ; v1(2640.7,3028.85) C35.N@2711.41,3028.85 ; v1(2640.7,3028.85) C35.N@2711.41,3028.85 ; v1(2640.7,3028.85) C35.N@2711.41,3028.85 ; v1(2640.7,3087.91) C35.N@2711.41,3087.91 ; v1(2640.7,3087.91) C35.N@2711.41,3087.91 ; v1(2640.7,3087.91) C35.N@2711.41,3087.91 ; v1(2640.7,3087.91) C35.N@2711.41,3087.91 ; v1(2640.7,3087.91) C35.N@2711.41,3087.91 ; C35.N@2711.41,3028.85 C35.N@2711.56,3028.85 ; C35.N@2711.41,3028.85 C35.N@2711.56,3028.85 ; C35.N@2711.41,3028.85 C35.N@2711.56,3028.85 ; C35.N@2711.41,3028.85 C35.N@2711.56,3028.85 ; C35.N@2711.41,3028.85 C35.N@2711.56,3028.85 ; C35.N@2711.41,3076.1 2711.56,3075.94 C35.N@2711.56,3028.85 ; C35.N@2711.41,3076.1 2711.41,3029.01 C35.N@2711.56,3028.85 ; C35.N@2711.41,3076.1 2711.56,3076.25 C35.N@2711.56,3087.91 ; C35.N@2711.41,3087.91 C35.N@2711.56,3087.91 ; C35.N@2711.41,3087.91 C35.N@2711.56,3087.91 ; C35.N@2711.41,3087.91 C35.N@2711.56,3087.91 ; C35.N@2711.41,3087.91 C35.N@2711.56,3087.91 ; C35.N@2711.41,3087.91 C35.N@2711.56,3087.91 ; v1(2818.45,1142.91) Y1.2@2818.45,1198.03 ; v1(2818.45,1142.91) Y1.2@2818.45,1198.03 ; v1(2818.45,1142.91) Y1.2@2818.45,1198.03 ; v1(2818.45,1142.91) Y1.2@2818.45,1198.03 ; v1(2818.45,1142.91) Y1.2@2818.45,1198.03 ; Q5.2@2948.18,1223.72 Q5.2@2948.37,1223.9 ; Q5.2@2948.18,1223.72 Q5.2@2948.37,1223.9 ; Q5.2@2948.18,1223.72 Q5.2@2948.37,1223.9 ; Q5.2@2948.18,1223.72 Q5.2@2948.37,1223.9 ; Q5.2@2948.18,1223.72 Q5.2@2948.37,1223.9 ; Q6.2@3097.78,1223.72 Q6.2@3097.98,1223.9 ; Q6.2@3097.78,1223.72 Q6.2@3097.98,1223.9 ; Q6.2@3097.78,1223.72 Q6.2@3097.98,1223.9 ; Q6.2@3097.78,1223.72 Q6.2@3097.98,1223.9 ; Q6.2@3097.78,1223.72 Q6.2@3097.98,1223.9 ; Q7.2@3247.39,1223.72 Q7.2@3247.59,1223.9 ; Q7.2@3247.39,1223.72 Q7.2@3247.59,1223.9 ; Q7.2@3247.39,1223.72 Q7.2@3247.59,1223.9 ; Q7.2@3247.39,1223.72 Q7.2@3247.59,1223.9 ; Q7.2@3247.39,1223.72 Q7.2@3247.59,1223.9 ; v1(3298.77,1308.27) C53.2@3334.2,1308.27 ; v1(3298.77,1308.27) C53.2@3334.2,1308.27 ; v1(3298.77,1308.27) C53.2@3334.2,1308.27 ; v1(3298.77,1308.27) C53.2@3334.2,1308.27 ; v1(3298.77,1308.27) C53.2@3334.2,1308.27 ; C54.N@3491.68,3186.22 C54.N@3511.37,3186.22 ; C54.N@3491.68,3186.22 C54.N@3511.37,3186.22 ; C54.N@3491.68,3186.22 C54.N@3511.37,3186.22 ; C54.N@3491.68,3186.22 C54.N@3491.68,3186.38 ; C54.N@3491.68,3186.22 C54.N@3491.68,3186.38 ; C54.N@3491.68,3186.22 C54.N@3491.68,3186.38 ; C54.N@3491.68,3186.22 C54.N@3511.37,3186.22 ; C54.N@3491.68,3186.22 C54.N@3491.68,3186.38 ; C54.N@3491.68,3186.22 C54.N@3511.37,3186.22 ; C54.N@3491.68,3186.22 C54.N@3491.68,3186.38 ; C54.N@3491.68,3186.38 v1(3491.68,3253.15) ; C54.N@3491.68,3186.38 v1(3491.68,3253.15) ; C54.N@3491.68,3186.38 v1(3491.68,3253.15) ; C54.N@3491.68,3186.38 v1(3491.68,3253.15) ; C54.N@3491.68,3186.38 v1(3491.68,3253.15) ; C54.N@3511.37,3186.22 C54.N@3511.52,3186.22 ; C54.N@3511.37,3186.22 C54.N@3511.52,3186.22 ; C54.N@3511.37,3186.22 C54.N@3511.52,3186.22 ; C54.N@3511.37,3186.22 C54.N@3511.52,3186.22 ; C54.N@3511.37,3186.22 C54.N@3511.52,3186.22 ; C54.N@3511.52,3186.22 C54.N@3511.37,3186.38 3550.58,3186.38 C54.N@3550.74,3186.22 ; C54.N@3511.52,3186.22 C54.N@3550.74,3186.22
  Top w25: v1(4748.55,4029.56) L2.1@4789.89,4029.56 ; v1(4748.55,4029.56) L2.1@4789.89,4029.56 ; v1(4748.55,4029.56) L2.1@4789.89,4029.56 ; v1(4748.55,4029.56) L2.1@4789.89,4029.56 ; v1(4748.55,4029.56) L2.1@4789.89,4029.56 ; v1(4748.55,4100.43) L2.1@4789.89,4100.43 ; v1(4748.55,4100.43) L2.1@4789.89,4100.43 ; v1(4748.55,4100.43) L2.1@4789.89,4100.43 ; v1(4748.55,4100.43) L2.1@4789.89,4100.43 ; v1(4748.55,4100.43) L2.1@4789.89,4100.43 ; L2.1@4789.89,4029.56 L2.1@4789.89,4065 L2.1@4789.89,4100.43
  Top w50: J11.4@177.15,4328.7 138.02,4328.7 84.95,4275.63 84.95,4171.41 139.44,4116.93 501.88,4116.93 584.51,4034.29 584.51,3113.03 714.63,2982.91 C8.N@841.49,2982.9 ; C8.N@841.49,2982.9 897.45,2982.9 898.57,2984.02 963.45,3048.9 C7.2@995.03,3048.9
  Bottom w5.91: C32.2@1905,2781 1909,2777 v1(1943,2777)
  Bottom w12.01: C216.2@4326.33,1248.33 C216.2@4323.27,1248.33 ; C212.2@4326.33,2531.8 C212.2@4323.27,2531.8 ; C233.2@4452.31,1248.33 4449.26,1248.33 C232.2@4390.85,1306.74 ; C230.2@4452.31,1494.19 4455.37,1494.19 4513.78,1435.78 4515.3,1434.25 C237.2@4515.3,1437.31 ; C228.2@4452.31,2531.8 C228.2@4449.26,2531.8 ; C225.2@4452.31,2777.65 C225.2@4449.26,2777.65 ; C215.2@4263.34,1308.27 C215.2@4264.86,1306.74 ; C215.2@4263.34,1308.27 C215.2@4264.86,1306.74 ; C215.2@4263.34,1308.27 C215.2@4264.86,1306.74 ; C215.2@4263.34,1308.27 C215.2@4264.86,1306.74 ; C215.2@4263.34,1308.27 C215.2@4264.86,1306.74 ; C211.2@4263.34,2591.73 C211.2@4264.86,2590.21 ; C211.2@4263.34,2591.73 C211.2@4264.86,2590.21 ; C211.2@4263.34,2591.73 C211.2@4264.86,2590.21 ; C211.2@4263.34,2591.73 C211.2@4264.86,2590.21 ; C211.2@4263.34,2591.73 C211.2@4264.86,2590.21 ; C211.2@4263.34,2591.73 C211.2@4264.86,2590.21 ; C211.2@4263.34,2591.73 C211.2@4264.86,2590.21 ; C211.2@4263.34,2591.73 C211.2@4264.86,2590.21 ; C211.2@4263.34,2591.73 C211.2@4264.86,2590.21 ; C211.2@4263.34,2591.73 C211.2@4264.86,2590.21 ; C211.2@4263.34,2591.73 C211.2@4264.86,2590.21 ; C211.2@4263.34,2591.73 C211.2@4264.86,2590.21 ; C211.2@4263.34,2591.73 C211.2@4264.86,2590.21 ; C211.2@4263.34,2591.73 C211.2@4264.86,2590.21 ; C211.2@4263.34,2591.73 C211.2@4264.86,2590.21 ; C211.2@4263.34,2591.73 C211.2@4264.86,2590.21 ; C211.2@4263.34,2591.73 C211.2@4264.86,2590.21 ; C211.2@4263.34,2591.73 C211.2@4264.86,2590.22 ; C215.2@4264.86,1306.74 C216.2@4323.27,1248.33 ; C215.2@4264.86,1306.74 C216.2@4323.27,1248.33 ; C215.2@4264.86,1306.74 C216.2@4323.27,1248.33 ; C215.2@4264.86,1306.74 C216.2@4323.27,1248.33 ; C215.2@4264.86,1306.74 C216.2@4323.27,1248.33 ; C211.2@4264.86,2590.21 C212.2@4323.27,2531.8 ; C211.2@4264.86,2590.21 C212.2@4323.27,2531.8 ; C211.2@4264.86,2590.21 C212.2@4323.27,2531.8 ; C211.2@4264.86,2590.21 C212.2@4323.27,2531.8 ; C211.2@4264.86,2590.21 C212.2@4323.27,2531.8 ; C211.2@4264.86,2590.2 C212.2@4323.27,2531.8 ; C232.2@4389.32,1308.27 C232.2@4390.85,1306.74 ; C232.2@4389.32,1308.27 C232.2@4390.85,1306.74 ; C232.2@4389.32,1308.27 C232.2@4390.85,1306.75 ; C232.2@4389.32,1308.27 C232.2@4390.85,1306.75 ; C232.2@4389.32,1308.27 C232.2@4390.85,1306.75 ; C232.2@4389.32,1308.27 C232.2@4390.85,1306.75 ; C232.2@4389.32,1308.27 C232.2@4390.85,1306.74 ; C232.2@4389.32,1308.27 C232.2@4390.85,1306.74 ; C232.2@4389.32,1308.27 C232.2@4390.85,1306.74 ; C232.2@4389.32,1308.27 C232.2@4390.85,1306.75 ; C232.2@4389.32,1308.27 C232.2@4390.85,1306.74 ; C232.2@4389.32,1308.27 C232.2@4390.85,1306.74 ; C232.2@4389.32,1308.27 C232.2@4390.85,1306.75 ; C232.2@4389.32,1308.27 C232.2@4390.85,1306.75 ; C232.2@4389.32,1308.27 C232.2@4390.85,1306.75 ; C232.2@4389.32,1308.27 C232.2@4390.85,1306.74 ; C232.2@4389.32,1308.27 C232.2@4390.85,1306.75 ; C232.2@4389.32,1308.27 C232.2@4390.85,1306.75 ; C227.2@4389.32,2591.73 C227.2@4390.85,2590.21 ; C227.2@4389.32,2591.73 C227.2@4390.85,2590.21 ; C227.2@4389.32,2591.73 C227.2@4390.85,2590.21 ; C227.2@4389.32,2591.73 C227.2@4390.85,2590.21 ; C227.2@4389.32,2591.73 C227.2@4390.85,2590.21 ; C226.2@4389.32,2717.72 C226.2@4390.85,2719.24 ; C226.2@4389.32,2717.72 C226.2@4390.85,2719.24 ; C226.2@4389.32,2717.72 C226.2@4390.85,2719.24 ; C226.2@4389.32,2717.72 C226.2@4390.85,2719.24 ; C226.2@4389.32,2717.72 C226.2@4390.85,2719.24 ; C226.2@4389.32,2717.72 C226.2@4390.85,2719.24 ; C226.2@4389.32,2717.72 C226.2@4390.85,2719.24 ; C226.2@4389.32,2717.72 C226.2@4390.85,2719.24 ; C226.2@4389.32,2717.72 C226.2@4390.85,2719.24 ; C226.2@4389.32,2717.72 C226.2@4390.85,2719.24 ; C227.2@4390.85,2590.21 C228.2@4449.26,2531.8 ; C227.2@4390.85,2590.21 C228.2@4449.26,2531.8 ; C227.2@4390.85,2590.21 C228.2@4449.26,2531.8 ; C227.2@4390.85,2590.21 C228.2@4449.26,2531.8 ; C227.2@4390.85,2590.21 C228.2@4449.26,2531.8 ; C226.2@4390.85,2719.24 C225.2@4449.26,2777.65 ; C226.2@4390.85,2719.24 C225.2@4449.26,2777.65 ; C226.2@4390.85,2719.24 C225.2@4449.26,2777.65 ; C226.2@4390.85,2719.24 C225.2@4449.26,2777.65 ; C226.2@4390.85,2719.24 C225.2@4449.26,2777.65 ; C226.2@4390.85,2719.24 C225.2@4449.26,2777.65
  Bottom w20: v1(716.09,4406.69) 794.83,4406.69 ; v1(794.83,4312.2) 794.83,4406.69 ; v1(810.58,4505.12) 810.58,4406.69 ; v1(873.57,4406.69) 810.58,4406.69 ; C100.2@1792,2306 v1(1792,2339.63) ; R147.1@1871,2307 v1(1871,2340.63) ; 2137.35,1485.43 C102.N@2137.35,1552.21 C102.N@2137.35,1552.36 ; v1(2225,2710.37) R26.1@2225,2744 ; C104.2@2336.93,2766.69 v1(2336.93,2797.3) ; v1(2409,1505.12) C112.2@2439.62,1505.12 ; C105.N@2711.41,3103.66 C105.N@2711.41,3146.96 ; v1(2723.97,1142.91) C124.N@2723.97,1209.68 C124.N@2723.97,1209.84 ; C115.2@2734.98,2847.64 v1(2765.59,2847.64) ; v1(3054.67,3839.76) 3098.26,3839.76 3098.45,3839.96 Q11.2@3099.85,3839.96 ; v1(3054.67,3989.37) 3098.26,3989.37 3098.45,3989.57 Q10.2@3099.85,3989.57 ; v1(3054.67,4138.98) 3054.87,4139.17 Q9.2@3099.85,4139.17 ; v1(3086.17,1430.31) R165.2@3086.17,1460.93 ; v1(3184.59,2851.57) C163.2@3215.21,2851.57 ; v1(3208.22,1430.31) R170.1@3208.22,1461.81 ; R163.1@3212.15,3457.87 v1(3251.52,3457.87) ; v1(3385.38,3186.22) C172.N@3436.56,3186.22 ; U26.3@3436.56,1283.39 3437.82,1284.65 v1(3483.81,1284.65) 3500.44,1284.65 C183.2@3523.18,1307.39 ; C182.2@3606.74,1788.58 v1(3637.35,1788.58) ; C181.2@3606.74,1859.45 v1(3672.78,1859.45) ; C180.2@3606.74,1989.37 v1(3637.35,1989.37) ; C179.2@3606.8,2210.19 C179.2@3606.72,2213.78 ; C187.2@3610.67,2379.13 v1(3641.29,2379.13) ; C186.2@3610.67,2583.86 v1(3641.29,2583.86) ; C185.2@3610.67,2698.03 v1(3660.97,2698.03) ; C205.2@4256.34,1107.48 v1(4286.96,1107.48) ; C215.2@4263.34,1305.21 4263.34,1308.27 v1(4263.34,1331.89) ; v1(4263.34,1410.63) C213.2@4263.34,1437.31 ; C211.2@4263.34,2588.68 4263.34,2591.73 v1(4263.34,2615.35) ; v1(4263.34,2694.09) C209.2@4263.34,2720.77 C210.2@4326.33,2720.77 ; C214.2@4326.33,1437.31 C231.2@4389.32,1437.31 v1(4389.32,1410.63) ; C208.2@4339.02,2918.5 v1(4369.63,2918.5) ; C170.2@4343.63,3516.02 4343.63,3480.49 v1(4343.87,3480.25) ; v1(4346.01,1631.1) C229.2@4376.63,1631.1 ; C232.2@4389.32,1305.21 4389.32,1308.27 v1(4389.32,1331.89) ; C227.2@4389.32,2588.68 4389.32,2591.73 v1(4389.32,2615.35) ; v1(4389.32,2694.09) 4389.32,2717.72 C226.2@4389.32,2720.77 ; C171.2@4406.62,3516.02 4406.62,3480.49 v1(4406.86,3480.25) ; R275.1@4432.63,1973.62 v1(4464.12,1973.62) ; C234.2@4480.75,1107.48 v1(4511.37,1107.48) ; C238.2@4515.3,1305.21 v1(4515.3,1331.89) ; v1(4515.3,1410.63) C237.2@4515.3,1434.25 ; C236.2@4515.3,2588.68 v1(4515.3,2615.35) ; v1(4515.3,2694.09) C235.2@4515.3,2720.77 ; C245.2@4638.23,1182.28 4640.42,1182.28 4641.29,1183.15 v1(4641.29,1221.65) 4641.29,1254.03 C244.2@4644.34,1257.09 ; C242.2@4638.23,2465.75 4640.42,2465.75 4641.29,2466.61 v1(4641.29,2505.12) 4641.29,2533.56 C241.2@4644.34,2536.61 ; C243.2@4669.73,1489.37 4672.78,1492.42 v1(4672.78,1520.87) ; C240.2@4669.73,2772.83 4672.78,2775.89 v1(4672.78,2804.33) ; v1(4670.63,865.58) C253.2@4670.63,900.13 ; C248.2@4739.71,941.24 4740.58,942.13 v1(4775.15,942.13) ; C251.2@4779.08,1309.15 4779.97,1308.27 v1(4814.52,1308.27) ; C247.2@4779.08,2744.39 4813.63,2744.39 v1(4814.52,2745.28) ; 794.83,4406.69 810.58,4406.69 ; v1(2042.86,1552.36) C102.N@2137.35,1552.36 ; v1(2042.86,1552.36) C102.N@2137.35,1552.36 ; v1(2042.86,1552.36) C102.N@2137.35,1552.36 ; v1(2042.86,1552.36) C102.N@2137.35,1552.36 ; v1(2042.86,1552.36) C102.N@2137.35,1552.36 ; C102.N@2137.35,1552.36 v1(2231.84,1552.36) ; C102.N@2137.35,1552.36 v1(2231.84,1552.36) ; C102.N@2137.35,1552.36 v1(2231.84,1552.36) ; C102.N@2137.35,1552.36 v1(2231.84,1552.36) ; C102.N@2137.35,1552.36 v1(2231.84,1552.36) ; v1(2640.7,3087.91) C105.N@2711.41,3087.91 ; v1(2640.7,3087.91) C105.N@2711.41,3087.91 ; v1(2640.7,3087.91) C105.N@2711.41,3087.91 ; v1(2640.7,3087.91) C105.N@2711.41,3087.91 ; v1(2640.7,3087.91) C105.N@2711.41,3087.91 ; v1(2640.7,3146.96) C105.N@2711.41,3146.96 ; v1(2640.7,3146.96) C105.N@2711.41,3146.96 ; v1(2640.7,3146.96) C105.N@2711.41,3146.96 ; v1(2640.7,3146.96) C105.N@2711.41,3146.96 ; v1(2640.7,3146.96) C105.N@2711.41,3146.96 ; v1(2668.85,1142.91) C124.N@2668.85,1209.68 ; v1(2668.85,1142.91) C124.N@2668.85,1209.68 ; v1(2668.85,1142.91) C124.N@2668.85,1209.68 ; v1(2668.85,1142.91) C124.N@2668.85,1209.68 ; v1(2668.85,1142.91) C124.N@2668.85,1209.68 ; C124.N@2668.85,1209.68 C124.N@2668.85,1209.84 ; C124.N@2668.85,1209.68 C124.N@2668.85,1209.84 ; C124.N@2668.85,1209.68 C124.N@2668.85,1209.84 ; C124.N@2668.85,1209.68 C124.N@2668.85,1209.84 ; C124.N@2668.85,1209.68 C124.N@2668.85,1209.84 ; C124.N@2668.85,1209.84 C124.N@2723.97,1209.84 ; C124.N@2668.85,1209.84 C124.N@2723.97,1209.84 ; C124.N@2668.85,1209.84 C124.N@2723.97,1209.84 ; C124.N@2668.85,1209.84 C124.N@2723.97,1209.84 ; C124.N@2668.85,1209.84 C124.N@2723.97,1209.84 ; C105.N@2711.41,3087.91 C105.N@2711.56,3087.91 ; C105.N@2711.41,3087.91 C105.N@2711.56,3087.91 ; C105.N@2711.41,3087.91 C105.N@2711.56,3087.91 ; C105.N@2711.41,3087.91 C105.N@2711.56,3087.91 ; C105.N@2711.41,3087.91 C105.N@2711.56,3087.91 ; C105.N@2711.41,3146.96 C105.N@2711.56,3146.96 ; C105.N@2711.41,3146.96 C105.N@2711.56,3146.96 ; C105.N@2711.41,3146.96 C105.N@2711.56,3146.96 ; C105.N@2711.41,3146.96 C105.N@2711.56,3146.96 ; C105.N@2711.41,3146.96 C105.N@2711.56,3146.96 ; C105.N@2711.41,3146.96 2711.41,3197.99 v1(2711.56,3198.14) C105.N@2711.56,3146.96 ; C105.N@2711.56,3087.91 C105.N@2711.56,3103.66 ; C105.N@2711.56,3087.91 C105.N@2711.56,3103.66 ; C105.N@2711.56,3087.91 C105.N@2711.56,3103.66 ; C105.N@2711.56,3087.91 C105.N@2711.56,3103.66 ; C105.N@2711.56,3087.91 C105.N@2711.56,3103.66 ; C105.N@2711.56,3103.66 C105.N@2711.56,3146.96 ; C105.N@2711.56,3103.66 C105.N@2711.56,3146.96 ; C105.N@2711.56,3103.66 C105.N@2711.56,3146.96 ; C105.N@2711.56,3103.66 C105.N@2711.56,3146.96 ; C105.N@2711.56,3103.66 C105.N@2711.56,3146.96 ; C124.N@2723.97,1209.84 C124.N@2771.21,1209.84 ; C124.N@2723.97,1209.84 C124.N@2771.21,1209.84 ; C124.N@2723.97,1209.84 C124.N@2771.21,1209.84 ; C124.N@2723.97,1209.84 C124.N@2771.21,1209.84 ; C124.N@2723.97,1209.84 C124.N@2771.21,1209.84 ; v1(2771.21,1142.91) C124.N@2771.21,1209.68 ; v1(2771.21,1142.91) C124.N@2771.21,1209.68 ; v1(2771.21,1142.91) C124.N@2771.21,1209.68 ; v1(2771.21,1142.91) C124.N@2771.21,1209.68 ; v1(2771.21,1142.91) C124.N@2771.21,1209.68 ; C124.N@2771.21,1209.68 C124.N@2771.21,1209.84 ; C124.N@2771.21,1209.68 C124.N@2771.21,1209.84 ; C124.N@2771.21,1209.68 C124.N@2771.21,1209.84 ; C124.N@2771.21,1209.68 C124.N@2771.21,1209.84 ; C124.N@2771.21,1209.68 C124.N@2771.21,1209.84 ; C172.N@3436.56,3186.22 C172.N@3436.56,3186.38 ; C172.N@3436.56,3186.22 C172.N@3436.56,3186.38 ; C172.N@3436.56,3186.22 C172.N@3436.56,3186.38 ; C172.N@3436.56,3186.22 C172.N@3436.56,3186.38 ; C172.N@3436.56,3186.22 C172.N@3436.56,3186.38 ; C172.N@3436.56,3186.22 C172.N@3472.15,3186.22 ; C172.N@3436.56,3186.22 3436.72,3186.38 C172.N@3472,3186.38 ; C172.N@3436.56,3186.38 v1(3436.56,3253.15) ; C172.N@3436.56,3186.38 v1(3436.56,3253.15) ; C172.N@3436.56,3186.38 v1(3436.56,3253.15) ; C172.N@3436.56,3186.38 v1(3436.56,3253.15) ; C172.N@3436.56,3186.38 v1(3436.56,3253.15) ; C172.N@3472,3186.38 C172.N@3472.31,3186.38 ; C172.N@3472,3186.38 C172.N@3472.15,3186.22 ; C172.N@3472.15,3186.22 C172.N@3483.65,3186.22 ; C172.N@3472.15,3186.22 C172.N@3472.31,3186.38 ; C172.N@3472.31,3186.38 C172.N@3483.81,3186.38 C172.N@3483.65,3186.22 ; C172.N@3483.65,3186.22 C172.N@3483.81,3186.22 ; C172.N@3483.65,3186.22 C172.N@3483.81,3186.22 ; C172.N@3483.65,3186.22 C172.N@3483.81,3186.22 ; C172.N@3483.65,3186.22 C172.N@3483.81,3186.22 ; C172.N@3483.65,3186.22 C172.N@3483.81,3186.22 ; C172.N@3483.81,3186.22 C172.N@3550.74,3186.22 ; C172.N@3483.81,3186.22 C172.N@3550.74,3186.22 ; C172.N@3483.81,3186.22 C172.N@3550.74,3186.22 ; C172.N@3483.81,3186.22 C172.N@3550.74,3186.22 ; C172.N@3483.81,3186.22 C172.N@3550.74,3186.22 ; C172.N@3550.74,3186.22 C172.N@3550.74,3186.38 ; C172.N@3550.74,3186.22 C172.N@3550.74,3186.38 ; C172.N@3550.74,3186.22 C172.N@3550.74,3186.38 ; C172.N@3550.74,3186.22 C172.N@3550.74,3186.38 ; C172.N@3550.74,3186.22 C172.N@3550.74,3186.38 ; C172.N@3550.74,3186.38 v1(3550.74,3253.15) ; C172.N@3550.74,3186.38 v1(3550.74,3253.15) ; C172.N@3550.74,3186.38 v1(3550.74,3253.15) ; C172.N@3550.74,3186.38 v1(3550.74,3253.15) ; C172.N@3550.74,3186.38 v1(3550.74,3253.15) ; C179.2@3606.72,2213.78 C179.2@3606.8,2213.78 ; C179.2@3606.72,2213.78 C179.2@3606.8,2213.78 ; C179.2@3606.72,2213.78 C179.2@3606.8,2213.78 ; C179.2@3606.72,2213.78 C179.2@3606.8,2213.78 ; C179.2@3606.72,2213.78 C179.2@3606.8,2213.78 ; C179.2@3606.8,2213.78 v1(3633.41,2213.78) ; C179.2@3606.8,2213.78 v1(3633.41,2213.78) ; C179.2@3606.8,2213.78 v1(3633.41,2213.78) ; C179.2@3606.8,2213.78 v1(3633.41,2213.78) ; C179.2@3606.8,2213.78 v1(3633.41,2213.78) ; C246.2@4772.09,2922.44 v1(4802.71,2922.44) C246.2@4772.09,2922.44
GND_CAM: J10.2 J10.7 U13.1 U13.6 U13.8 | length 194
  Top w20: v1(489,781) U13.8@555,781 ; v1(490,881) U13.6@555,881 ; v1(492,1132) U13.1@555,1132
INA1_1: J4.2 U11.G21 | length 2766.5
  Top w5.91: v1(2633.41,1953.94) U11.G21@2653.1,1934.25
  Signal 6 w5.91: J4.2@733,558 834,659 1590,659 1686,755 1686,1169.11 2322,1805.11 2322,1834.85 2421.41,1934.25 2613.73,1934.25 v1(2633.41,1953.94)
INA1_2: J4.6 U11.F25 | length 2414.7
  Top w5.91: v1(2475.93,1914.57) U11.F25@2495.62,1894.88
  Signal 3 w5.91: J4.6@933,558 1135,760 1768,760 1805,797 1805,835 2122,1152 2122,1595.48 2421.41,1894.88 2456.25,1894.88 v1(2475.93,1914.57)
INA1_3: J4.12 U11.D25 | length 2144.8
  Top w5.91: v1(2475.93,1796.45) U11.D25@2495.62,1816.14
  Signal 3 w5.91: J4.12@1233,558 1367,692 1953,692 2325,1064 2325,1680.36 2421.41,1776.77 2456.25,1776.77 v1(2475.93,1796.45)
INA1_4: J4.16 U11.A18 | length 2025.3
  Top w5.91: J4.16@1433,558 1434,559 1434,650 1523,739 1985,739 2535,1289 2638,1289 2704,1355 2704,1630.82 U11.A18@2771.21,1698.03
INA1_5: J4.22 U11.B17 | length 1797.4
  Top w5.91: J4.22@1733,558 1734,559 1734,658 1783,707 1972,707 2532.19,1267.19 2636.19,1267.19 2724,1355 2724,1503 2790.89,1569.89 v1(2790.89,1717.71) U11.B17@2810.58,1737.4
INA1_6: J4.26 U11.B20 | length 1495
  Top w5.91: v1(2672.78,1717.71) U11.B20@2692.47,1737.4
  Signal 3 w5.91: J4.26@1933,558 1933,559 2547.82,1173.82 2547.82,1518.54 2674,1644.72 2674,1716.5 v1(2672.78,1717.71)
INA1_7: J4.32 U11.K18 | length 1733.6
  Top w5.91: v1(2751.52,2032.67) U11.K18@2771.21,2052.36
  Signal 7 w5.91: J4.32@2233,558 2233,975 2771.21,1513.21 2771.21,2012.99 v1(2751.52,2032.67)
INA1_8: J7.2 U11.C11 | length 1253.1
  Top w5.91: v1(3027.11,1757.08) U11.C11@3046.8,1776.77
  Signal 3 w5.91: v1(3027.11,1757.08) 3046.8,1737.4 3046.8,1663.19 3064,1645.99 3064,581 J7.2@3088,557
INA1_9: J7.8 U11.D9 | length 1384.2
  Top w5.91: v1(3105.85,1796.45) U11.D9@3125.54,1816.14
  Signal 4 w5.91: v1(3105.85,1796.45) 3125.54,1776.77 3125.54,1608.46 3181,1553 3181,764 J7.8@3388,557
INA1_10: J7.12 U11.F8 | length 1529.4
  Top w5.91: U11.F8@3164.91,1894.88 v1(3184.6,1875.19)
  Signal 4 w5.91: v1(3184.6,1875.19) 3164.91,1855.51 3164.91,1602.09 3272,1495 3272,873 J7.12@3588,557
INA1_11: J7.18 U11.A8 | length 1440.5
  Top w5.91: U11.A8@3164.91,1698.03 3184.6,1678.34 3184.6,1626.4 3372,1439 3372,1118 3888,602 J7.18@3888,557
INA1_12: J7.22 U11.C6 | length 1689
  Top w5.91: U11.C6@3243.65,1776.77 v1(3263.34,1757.08)
  Signal 3 w5.91: v1(3263.34,1757.08) 3283.02,1737.4 3283.02,1575.98 3533,1326 3533,908 3783,658 3987,658 J7.22@4088,557
INA2_1: J4.4 U11.G24 | length 2571.4
  Top w5.91: v1(2515.3,1914.56) U11.G24@2534.99,1934.25
  Signal 3 w5.91: J4.4@833,558 833,631 1015,813 1050,813 1193,956 1853.3,956 2082,1184.7 2082,1594.85 2421.41,1934.25 2495.62,1934.25 v1(2515.3,1914.56)
INA2_2: J4.8 U11.G23 | length 2137.5
  Top w5.91: v1(2554.67,1914.56) U11.G23@2574.36,1934.25
  Signal 4 w5.91: J4.8@1033,558 1206,731 1257.53,731 1317.02,790.5 1317.02,835.02 1365.24,883.24 1409.76,883.24 2421.41,1894.88 2534.99,1894.88 v1(2554.67,1914.56)
INA2_3: J4.14 U11.D23 | length 1865.2
  Top w5.91: v1(2554.67,1796.45) U11.D23@2574.36,1816.14
  Signal 4 w5.91: J4.14@1333,558 1394,619 1439,619 1568.82,748.82 1568.82,924.18 2421.41,1776.77 2534.99,1776.77 v1(2554.67,1796.45)
INA2_4: J4.18 U11.C21 | length 1776.9
  Top w5.91: v1(2633.41,1796.46) U11.C21@2653.1,1776.77
  Signal 4 w5.91: J4.18@1533,558 1533,582.46 1694.27,743.73 1694.27,837.27 1792.66,935.66 1886.2,935.66 2613.73,1663.19 2613.73,1776.77 v1(2633.41,1796.46)